# EAGLE board EEG (EAGLE 9.6.2)
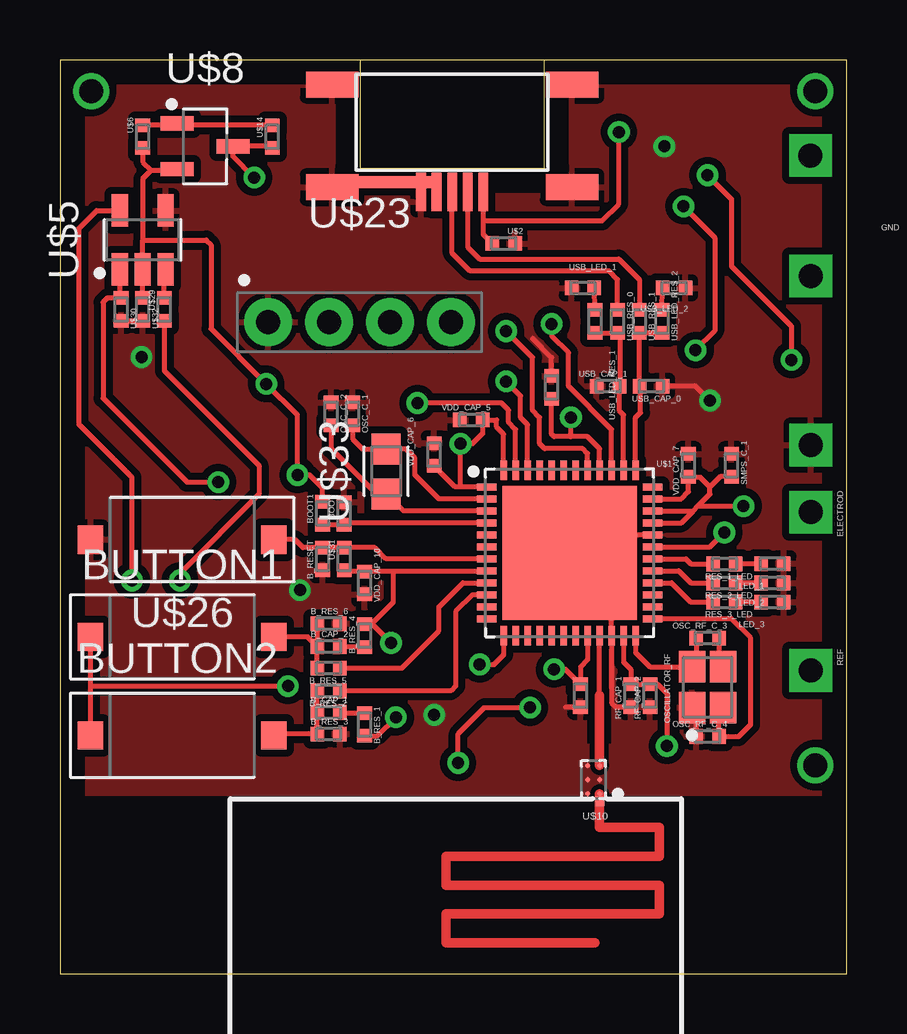
[diagram p0: board, top side]
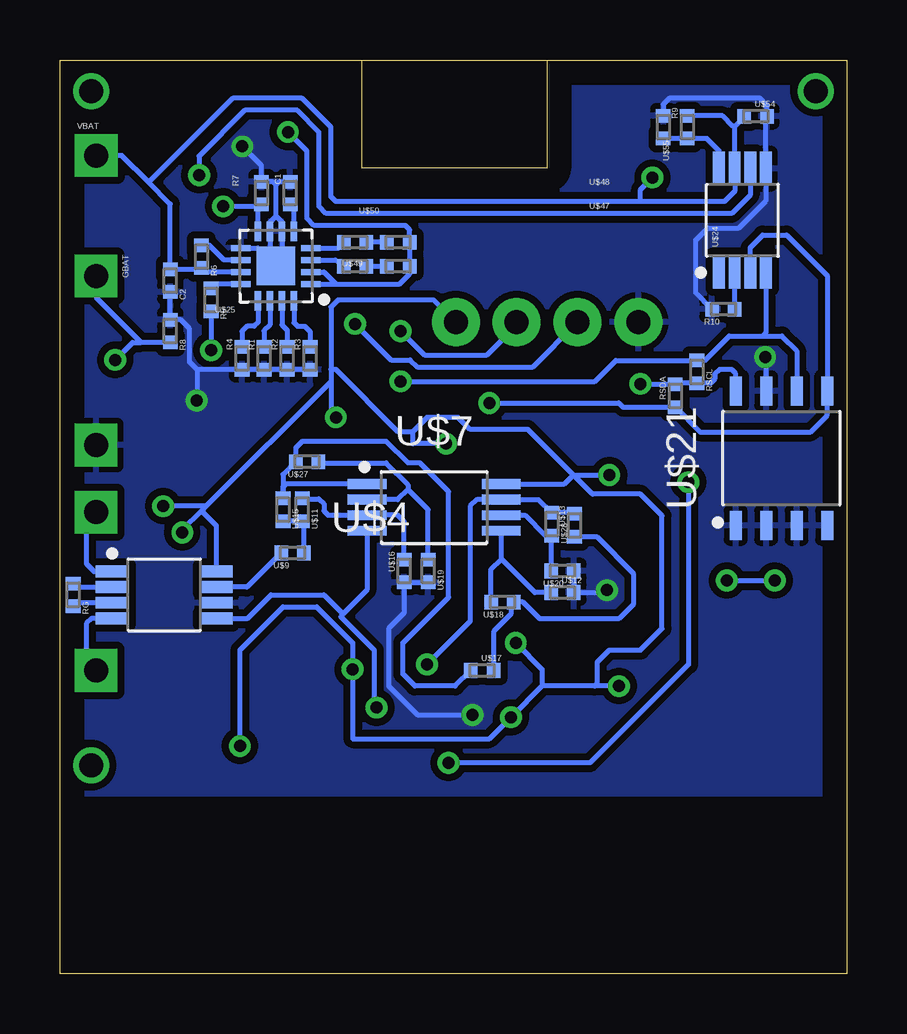
[diagram p1: board, bottom side, seen from below]

Size 32.8 x 38.1 mm. Coordinates in mm from the lower left corner, seen from the top.
Outline: 0,0 32.8,0 32.8,38.1 0,38.1 0,0
Copper layers (1*16): Top 0.035mm / dielectric 1.5mm / Bottom 0.035mm
Design rules "default": minimum track width 6mil, minimum drill 0.35mm, track to track 6mil, track to pad 6mil, pad to pad 6mil, via to via 6mil, smd to smd 6mil, copper to edge 40mil, drill to drill 6mil, minimum pad ring 10mil, minimum via ring 8mil, stop-mask expansion 4mil, vias tented up to drill 0mil, thermal gap 10mil

## Footprints (pad centres in the part's own frame; a part is rotated, then mirrored left to right if it is on the bottom)
C0402 = smd 0.562 x 0.612: 1 -0.475,0; 2 0.475,0
R0402 = smd 0.562 x 0.612: 1 -0.475,0; 2 0.475,0
BUTTON = smd 1.062 x 1.172: 1 -3.825,0; 2 3.825,0
PIN-1 = drill 1 pad 1.778 square: P$1 0,0
NX2520SA = smd 1.312 x 1.112: 1 -0.85,0.65; 2 -0.85,-0.65; 3 0.85,-0.65; 4 0.85,0.65
STM32WB55 = smd 0.812 x 0.282: 1 -3.45,2.75; 2 -3.45,2.25; 3 -3.45,1.75; 4 -3.45,1.25; 5 -3.45,0.75; 6 -3.45,0.25; 7 -3.45,-0.25; 8 -3.45,-0.75; 9 -3.45,-1.25; 10 -3.45,-1.75; 11 -3.45,-2.25; 12 -3.45,-2.75; 25 3.45,-2.75; 26 3.45,-2.25; 27 3.45,-1.75; 28 3.45,-1.25; 29 3.45,-0.75; 30 3.45,-0.25; 31 3.45,0.25; 32 3.45,0.75; 33 3.45,1.25; 34 3.45,1.75; 35 3.45,2.25; 36 3.45,2.75 | smd 0.282 x 0.812: 13 -2.75,-3.45; 14 -2.25,-3.45; 15 -1.75,-3.45; 16 -1.25,-3.45; 17 -0.75,-3.45; 18 -0.25,-3.45; 19 0.25,-3.45; 20 0.75,-3.45; 21 1.25,-3.45; 22 1.75,-3.45; 23 2.25,-3.45; 24 2.75,-3.45; 37 2.75,3.45; 38 2.25,3.45; 39 1.75,3.45; 40 1.25,3.45; 41 0.75,3.45; 42 0.25,3.45; 43 -0.25,3.45; 44 -0.75,3.45; 45 -1.25,3.45; 46 -1.75,3.45; 47 -2.25,3.45; 48 -2.75,3.45 | smd 5.6 x 5.6: 49 0,0
ANT = smd 0.4 x 0.4: ANT_IN 0,0.2
AD8422 = smd 1.362 x 0.497: 1 -2.175,0.975; 2 -2.175,0.325; 3 -2.175,-0.325; 4 -2.175,-0.975; 5 2.175,-0.975; 6 2.175,-0.325; 7 2.175,0.325; 8 2.175,0.975
TPS60403 = smd 1.362 x 0.672: 1 -1.225,0.95; 2 -1.225,0; 3 -1.225,-0.95; 4 1.225,-0.95; 5 1.225,0.95
LM358 = smd 1.612 x 0.407: 1 -2.8,0.975; 2 -2.8,0.325; 3 -2.8,-0.325; 4 -2.8,-0.975; 5 2.8,-0.975; 6 2.8,-0.325; 7 2.8,0.325; 8 2.8,0.975
MCP1703 = smd 1.382 x 0.598: 1 -1.163,0.95; 2 -1.163,-0.95; 3 1.163,0
MLPF-WB55-01E3 = smd 0.2 x 0.2: A1 -0.25,0.587; A2 0.25,0.587; B1 -0.25,0; B2 0.25,0; C1 -0.25,-0.587; C2 0.25,-0.587
M24M01 = smd 1.212 x 0.502: 1 -2.8,1.905; 2 -2.8,0.635; 3 -2.8,-0.635; 4 -2.8,-1.905; 5 2.8,-1.905; 6 2.8,-0.635; 7 2.8,0.635; 8 2.8,1.905
USBT = smd 2.184 x 1.067: P$1 5,1.57; P$2 -5,1.57; P$3 -5,-2.7; P$4 5,-2.7 | smd 0.406 x 0.813: P$5 0,-2.5; P$6 -0.65,-2.5; P$7 0.65,-2.5; P$8 1.3,-2.5; P$9 -1.3,-2.5; P$10 0,-3.3; P$11 -0.65,-3.3; P$12 -1.3,-3.3; P$13 0.65,-3.3; P$14 1.3,-3.3 | smd 1.016 x 0.508: P$15 -1.35,-2.5; P$16 -2.35,-2.5; P$17 -3.35,-2.5; P$18 -4.1,-2.5
SWD = drill 1 pad 2: 1 -3.81,0; 2 -1.27,0; 3 1.27,0; 4 3.81,0
STC3100 = smd 1.412 x 0.492: 1 -2.15,0.975; 2 -2.15,0.325; 3 -2.15,-0.325; 4 -2.15,-0.975; 5 2.15,-0.975; 6 2.15,-0.325; 7 2.15,0.325; 8 2.15,0.975
L6924D = smd 0.812 x 0.256: 1 -1.45,0.75; 2 -1.45,0.25; 3 -1.45,-0.25; 4 -1.45,-0.75; 9 1.45,-0.75; 10 1.45,-0.25; 11 1.45,0.25; 12 1.45,0.75 | smd 0.256 x 0.812: 5 -0.75,-1.45; 6 -0.25,-1.45; 7 0.25,-1.45; 8 0.75,-1.45; 13 0.75,1.45; 14 0.25,1.45; 15 -0.25,1.45; 16 -0.75,1.45 | smd 1.6 x 1.6: 17 0,0
RESM2012X60N = smd 1.287 x 1.212: 1 -0.938,0; 2 0.938,0

## Placement (x,y rotation side)
B_CAP_1  0.1u  [C0402]  11.2,10.9 180 top
B_CAP_2  0.1u  [C0402]  11.2,13.65 180 top
B_RES_1  100om  [R0402]  12.7,10.4 90 top
B_RES_2  220om  [R0402]  11.2,11.8 0 top
B_RES_3  220k  [R0402]  11.2,10 180 top
B_RES_4  100om  [R0402]  12.7,14.1 270 top
B_RES_5  220om  [R0402]  11.2,12.75 0 top
B_RES_6  220k  [R0402]  11.2,14.6 180 top
B_RESET  1uf  [C0402]  10.95,17.3 270 top
BOOT  BOOT  [C0402]  11.84,19.19 270 top
BOOT1  BOOT  [C0402]  10.95,19.2 270 top
BUTTON1  BUTTON  [BUTTON]  5.1,14.05 0 top
BUTTON2  BUTTON  [BUTTON]  5.1,9.95 0 top
C1  10nf  [C0402]  23.2,32.55 270 bottom
C2  4.7uf  [C0402]  28.2,28.9 90 bottom
ELECTROD  PIN-1  [PIN-1]  31.3,19.25 270 top
GBAT  PIN-1  [PIN-1]  31.3,29.1 270 bottom
GND  PIN-1  [PIN-1]  31.3,22.05 270 top
LED_1  LED  [R0402]  29.7,17.1 0 top
LED_2  LED  [R0402]  29.7,16.3 0 top
LED_3  LED  [R0402]  29.7,15.5 0 top
OSC_C_1  0  [C0402]  12.2,23.35 90 top
OSC_C_2  0  [C0402]  11.3,23.35 90 top
OSC_RF_C_3  0  [C0402]  27,14 180 top
OSC_RF_C_4  0  [C0402]  27,9.9 180 top
OSCILLATOR_RF  32mhz  [NX2520SA]  27,11.95 90 top
R1  60k  [R0402]  24.29,25.66 270 bottom
R2  50k  [R0402]  23.33,25.66 270 bottom
R3  50k  [R0402]  22.37,25.66 270 bottom
R4  3.3k  [R0402]  25.21,25.66 270 bottom
R5  1k  [R0402]  26.5,28.1 90 bottom
R6  0  [R0402]  26.9,29.9 90 bottom
R7  470  [R0402]  24.4,32.55 90 bottom
R8  10-50mO  [R0402]  28.2,26.8 90 bottom
R9  1k  [R0402]  6.65,35.3 270 bottom
R10  200k  [R0402]  5.14,27.71 0 bottom
REF  PIN-1  [PIN-1]  31.3,12.65 270 top
RES_1_LED  680om  [R0402]  27.7,17.09 0 top
RES_2_LED  680om  [R0402]  27.7,16.3 0 top
RES_3_LED  680om  [R0402]  27.7,15.51 0 top
RF_CAP_1  100pf  [C0402]  23.8,11.6 270 top
RF_CAP_2  100pf  [C0402]  24.6,11.6 270 top
RG  1Om  [R0402]  32.25,15.8 90 bottom
RSCL  4.7K  [R0402]  6.25,25.1 90 bottom
RSDA  4.7K  [R0402]  7.15,24.1 270 bottom
SMPS_C_1  100nf  [C0402]  28,21.2 90 top
U$1  STM32WB55  [STM32WB55]  21.25,17.55 0 top
U$2  1uf  [C0402]  18.5,30.45 180 top
U$3  ANT  [ANT]  22.5,7.4 180 top
U$4  AD8422  [AD8422]  28.45,15.8 0 bottom
U$5  TPS60403  [TPS60403]  3.45,30.6 90 top
U$6  1uf  [C0402]  3.45,34.9 270 top
U$7  LM358  [LM358]  17.2,19.45 0 bottom
U$8  MCP1703  [MCP1703]  6.05,34.5 0 top
U$9  330nf  [C0402]  23.1,17.55 0 bottom
U$10  MLPF-WB55-01E3DEFAULT  [MLPF-WB55-01E3]  22.25,8.1 180 top
U$11  330nf  [C0402]  22.7,19.35 90 bottom
U$12  330nf  [C0402]  11.85,15.9 180 bottom
U$13  330nf  [C0402]  11.35,18.7 270 bottom
U$14  1uf  [C0402]  8.85,34.9 270 top
U$15  60k  [R0402]  23.5,19.35 90 bottom
U$16  60k  [R0402]  18.45,16.8 270 bottom
U$17  9.5k  [R0402]  15.2,12.65 180 bottom
U$18  9.5k  [R0402]  14.35,15.5 0 bottom
U$19  0  [R0402]  17.45,16.8 90 bottom
U$20  0  [R0402]  11.85,16.8 0 bottom
U$21  M24M01  [M24M01]  2.72,21.5 90 bottom
U$22  USBUSBT  [USBT]  16.35,35.5 0 top
U$23  SWDSWDD  [SWD]  12.49,27.17 0 top
U$24  STC3100  [STC3100]  4.35,31.42 90 bottom
U$25  L6924D  [L6924D]  23.8,29.51 180 bottom
U$26  BUTTON  [BUTTON]  5.1,18.1 180 top
U$27  0  [R0402]  22.5,21.35 0 bottom
U$28  0  [R0402]  12.3,18.75 90 bottom
U$29  1uf  [C0402]  4.35,27.7 270 top
U$30  1uf  [C0402]  2.55,27.7 90 top
U$31  RESISTORR0402  [R0402]  11.85,17.3 270 top
U$32  1uf  [C0402]  3.45,27.7 90 top
U$33  OSC_32KH  [RESM2012X60N]  13.6,20.95 90 top
U$47  1k  [R0402]  18.7,29.5 180 bottom
U$48  1k  [R0402]  18.7,30.5 180 bottom
U$49  LED  [R0402]  20.5,29.5 180 bottom
U$50  LED  [R0402]  20.5,30.5 180 bottom
U$54  1uf  [C0402]  3.8,35.75 180 bottom
U$55  220nf  [C0402]  7.65,35.3 90 bottom
USB_CAP_0  47p  [C0402]  24.65,24.5 0 top
USB_CAP_1  47p  [C0402]  22.85,24.5 180 top
USB_LED_1  LED  [R0402]  21.8,28.6 180 top
USB_LED_2  LED  [R0402]  25.6,28.6 0 top
USB_LED_RES_1  5k  [R0402]  22.3,27.2 90 top
USB_LED_RES_2  5k  [R0402]  25.1,27.2 90 top
USB_RES_0  22om  [R0402]  23.25,27.2 90 top
USB_RES_1  22om  [R0402]  24.15,27.2 90 top
VBAT  PIN-1  [PIN-1]  31.29,34.12 0 bottom
VDD_CAP_1  100nf  [C0402]  21.7,11.6 90 top
VDD_CAP_5  100nf  [C0402]  17.15,23.1 180 top
VDD_CAP_6  4.7 uf  [C0402]  15.6,21.65 270 top
VDD_CAP_7  100nf  [C0402]  26.2,21.2 270 top
VDD_CAP_10  1 uf  [C0402]  12.7,16.3 90 top
VDDUSB_CAP_2  0  [C0402]  20.5,24.45 90 top

## Library data of the parts
B_CAP_1 B_CAP_2 B_RES_1-B_RES_6 B_RESET BOOT BOOT1 BUTTON1 BUTTON2 C1 C2 ELECTROD GBAT GND LED_1-LED_3 OSC_C_1 OSC_C_2 OSC_RF_C_3 OSC_RF_C_4 OSCILLATOR_RF R1-R10 REF RES_1_LED RES_2_LED RES_3_LED RF_CAP_1 RF_CAP_2 RG RSCL RSDA SMPS_C_1 U$1-U$33 U$47-U$50 U$54 U$55 USB_CAP_0 USB_CAP_1 USB_LED_1 USB_LED_2 USB_LED_RES_1 USB_LED_RES_2 USB_RES_0 USB_RES_1 VBAT VDD_CAP_1 VDD_CAP_5-VDD_CAP_7 VDD_CAP_10 VDDUSB_CAP_2 = EEG

## Nets
GND: B_RES_3.1 B_RES_6.1 B_RESET.2 BOOT.1 C1.1 C2.1 GND.P$1 LED_1.2 LED_2.2 LED_3.2 OSC_C_1.2 OSC_C_2.2 OSC_RF_C_4.2 OSCILLATOR_RF.1 R1.2 R2.2 R3.2 R4.2 R7.2 R8.2 R10.1 RF_CAP_1.2 RF_CAP_2.2 SMPS_C_1.2 U$1.22 U$1.32 U$1.49 U$2.1 U$4.6 U$5.4 U$10.A2 U$10.B1 U$10.B2 U$10.C2 U$12.1 U$16.2 U$19.1 U$20.2 U$21.1 U$21.2 U$21.3 U$21.4 U$21.7 U$22.P$1 U$22.P$2 U$22.P$3 U$22.P$4 U$22.P$12 U$23.1 U$24.5 U$25.6 U$25.7 U$25.9 U$25.17 U$26.2 U$30.1 U$32.1 U$54.1 U$55.2 USB_CAP_0.2 USB_CAP_1.2 USB_LED_1.2 USB_LED_2.2 VDD_CAP_1.1 VDD_CAP_5.2 VDD_CAP_6.1 VDD_CAP_7.1 VDD_CAP_10.1 VDDUSB_CAP_2.2
N$1: U$1.21 U$10.C1
N$2: BOOT1.2 BOOT.2 U$1.4
N$3: U$1.39 U$23.2
N$4: OSC_RF_C_4.1 OSCILLATOR_RF.2 U$1.25
N$5: U$1.41 U$23.3
N$6: RES_1_LED.1 U$1.30
N$7: U$3.ANT_IN U$10.A1
N$8: RES_2_LED.1 U$1.29
N$9: RES_3_LED.1 U$1.28
N$10: LED_1.1 RES_1_LED.2
N$11: LED_2.1 RES_2_LED.2
N$12: LED_3.1 RES_3_LED.2
N$13: U$1.37 USB_CAP_0.1 USB_LED_RES_2.1 USB_RES_1.1
N$14: U$1.38 USB_CAP_1.1 USB_LED_RES_1.1 USB_RES_0.1
N$15: R10.2 U$24.2
N$16: B_RES_5.2 U$1.9
N$18: B_CAP_2.2 B_RES_5.1 B_RES_6.2 BUTTON1.2
N$19: U$22.P$10 USB_RES_0.2
N$20: U$22.P$13 USB_RES_1.2
N$21: U$2.2 U$22.P$14 U$25.1 U$25.2 U$47.1 U$48.1
N$22: R2.1 U$25.15
N$23: RSDA.2 U$1.47 U$21.5 U$24.3
N$24: B_CAP_2.1 B_RES_4.2
N$25: B_RES_2.2 U$1.10
N$26: OSC_C_2.1 U$1.3 U$33.1
N$27: B_RESET.1 U$1.7 U$26.1 U$31.1
N$28: OSC_C_1.1 U$1.2 U$33.2
N$29: USB_LED_2.1 USB_LED_RES_2.2
N$30: OSC_RF_C_3.1 OSCILLATOR_RF.3
N$31: C1.2 U$25.5
N$32: U$48.2 U$50.1
N$33: U$47.2 U$49.1
N$34: R3.1 U$25.16
N$35: U$25.3 U$49.2
N$36: U$25.4 U$50.2
N$38: R4.1 U$25.13
N$39: R1.1 U$25.14
N$42: R9.2 U$24.8 U$55.1
N$44: R5.1 R7.1 U$25.8
N$45: R5.2 U$25.12
N$46: RSCL.2 U$1.46 U$21.6 U$24.4
N$47: R6.2 U$25.10
N$48: GBAT.P$1 R8.1 U$24.6
N$49: USB_LED_1.1 USB_LED_RES_1.2
N$52: RG.2 U$4.2
N$53: RG.1 U$4.3
N$54: REF.P$1 U$4.4
N$55: ELECTROD.P$1 U$4.1
N$56: U$4.7 U$9.1
N$57: U$7.1 U$15.2 U$17.2 U$27.1
N$58: U$7.3 U$11.2 U$16.1
N$59: U$9.2 U$11.1 U$15.1
N$60: U$7.2 U$19.2 U$27.2
N$61: U$7.5 U$12.2 U$18.1
N$62: U$13.2 U$17.1 U$18.2
N$63: U$1.13 U$7.7 U$13.1 U$28.2
N$64: U$7.6 U$20.1 U$28.1
N$65: B_CAP_1.2 B_RES_2.1 B_RES_3.2 BUTTON2.2
N$66: U$6.1 U$8.1 U$14.1
N$67: U$5.3 U$29.1
N$68: U$5.5 U$29.2
N$69: B_CAP_1.1 B_RES_1.2
N$74: OSC_RF_C_3.2 OSCILLATOR_RF.4 U$1.24
V+: B_RES_1.1 B_RES_4.1 BOOT1.1 BUTTON1.1 BUTTON2.1 RF_CAP_1.1 RF_CAP_2.1 RSCL.1 RSDA.1 SMPS_C_1.1 U$1.1 U$1.8 U$1.20 U$1.23 U$1.31 U$1.33 U$1.34 U$1.35 U$1.40 U$1.48 U$4.8 U$5.2 U$6.2 U$7.8 U$8.2 U$21.8 U$23.4 U$31.2 U$32.2 VDD_CAP_1.2 VDD_CAP_5.1 VDD_CAP_6.2 VDD_CAP_7.2 VDD_CAP_10.2 VDDUSB_CAP_2.1
V-: U$4.5 U$5.1 U$7.4 U$30.2
VDD: C2.2 R6.1 R9.1 U$8.3 U$14.2 U$24.7 U$25.11 U$54.2 VBAT.P$1

## Tracks (layer width: path | path; a pad name or v marks a point on that pad's centre or on a via)
GND  (via drill 0.5 pad 0.75)
  Top 0.2: U$1.32 22.1,18.3 21.35,17.55 U$1.49 23,15.8 U$1.22 23,11.3 23.18,11.12 RF_CAP_1.2 | OSC_RF_C_4.2 26.52,10.92 OSCILLATOR_RF.1 | U$32.1 U$30.1 | 21.07,11.12 VDD_CAP_1.1 | v27.1,23.9 26.5,24.5 USB_CAP_0.2 | VDDUSB_CAP_2.2 20.5,25.7 19.7,26.5
  Bottom 0.2: U$25.17 24.05,29.76 U$25.7 24.05,31.35 23.8,31.6 | U$25.17 23.55,29.76 U$25.6 23.55,31.35 23.8,31.6 | 23.8,31.6 23.8,32.9 | 23.8,32.9 23.68,33.03 C1.1 | 23.8,32.9 23.93,33.03 R7.2 24.4,33.7 v25.2,34.5 | U$25.9 24.55,30.26 U$25.17 | 28.18,28.4 C2.1 R8.2 27.77,27.28 27.4,26.9 27.4,25.5 27.09,25.19 | R3.2 R2.2 R1.2 R4.2 27.09,25.19 | R10.1 6.3,28.39 6.3,30.6 5.8,31.1 4.5,31.1 3.38,32.22 U$24.5 3.38,35.7 U$54.1 3.32,36.22 3.6,36.5 7.4,36.5 7.65,36.25 U$55.2 | U$21.7 3.35,25.67 v3.4,25.72 | U$19.1 U$16.2 18.45,15.05 19.1,14.4 19.1,12 17.9,10.8 v15.6,10.8 | U$20.2 U$12.1 10.1,15.9 v10,16 | 27.09,25.19 27.09,23.92 v27.1,23.9
  pour Top (isolate 0.3): 32.7,7.5 0.1,7.5 0.1,38 12.3,38 12.3,33.1 20.4,33.1 20.4,38 32.7,38
  pour Top (isolate 0.2): 20.9,7.6 20.9,9.4 20.8,9.5 23.6,9.5 23.8,9.3 23.8,7.6
  pour Bottom (isolate 0.3): 0.1,7.5 0.1,38 12.4,38 12.4,33.5 20.3,33.5 20.3,38 32.7,38 32.7,7.5
N$1
  Top 0.2: 22.5,11.6 U$1.21
  Top 0.4: U$10.C1 22.5,11.6
N$2
  Top 0.2: U$1.4 11.92,18.8 BOOT.2 10.96,18.72 BOOT1.2
N$3  (via drill 0.5 pad 0.75)
  Top 0.2: U$1.39 23,22.7 21.2,24.5 21.2,25.9 20.5,26.6 v20.5,27.1
  Bottom 0.2: v20.5,27.1 19,25.6 18.2,25.6 17.9,25.3 13.09,25.3 U$23.2
N$4
  Top 0.2: OSCILLATOR_RF.2 27.48,10.92 OSC_RF_C_4.1 28.3,9.9 28.8,10.4 28.8,14 28,14.8 U$1.25
N$5  (via drill 0.5 pad 0.75)
  Top 0.2: U$1.41 22,21.7 21.8,21.9 20.2,21.9 20,22.1 20,23.2 19.7,23.5 19.7,25.7 v18.6,26.8
  Bottom 0.2: v18.6,26.8 17.6,25.8 15,25.8 13.76,27.04 U$23.3
N$6
  Top 0.2: U$1.30 26.1,17.3 26.31,17.09 RES_1_LED.1
N$7
  Top 0.4: U$10.A1 U$3.ANT_IN
N$8
  Top 0.2: U$1.29 25.8,16.8 26.3,16.3 RES_2_LED.1
N$9
  Top 0.2: U$1.28 25.5,16.3 26.29,15.51 RES_3_LED.1
N$10
  Top 0.2: LED_1.1 29.21,17.09 RES_1_LED.2
N$11
  Top 0.2: LED_2.1 RES_2_LED.2
N$12
  Top 0.2: LED_3.1 28.18,15.5 RES_3_LED.2
N$13
  Top 0.2: 24,24.33 USB_CAP_0.1 | USB_CAP_0.1 24.15,24.53 USB_RES_1.1 USB_LED_RES_2.1 | U$1.37 24,23.2 24.2,23.4 24.2,24.47 USB_CAP_0.1
N$14
  Top 0.2: 23.5,24.33 USB_CAP_1.1 | USB_CAP_1.1 23.35,24.53 23.35,26.62 USB_RES_0.1 USB_LED_RES_1.1 | USB_CAP_1.1 23.32,23.47 23.5,23.3 U$1.38
N$15
  Bottom 0.2: R10.2 4.66,29.26 U$24.2
N$16
  Top 0.2: B_RES_5.2 14.25,12.75 15.8,14.3 15.8,15.3 16.8,16.3 U$1.9
N$18
  Top 0.2: B_RES_5.1 B_CAP_2.2 | B_RES_6.2 B_CAP_2.2 | B_CAP_2.2 10.32,14.05 BUTTON1.2
N$19
  Top 0.2: USB_RES_0.2 23.25,28.95 22.9,29.3 17.1,29.3 16.35,30.05 U$22.P$10
N$20
  Top 0.2: U$22.P$13 17,30.3 17.5,29.8 23.3,29.8 24.15,28.95 USB_RES_1.2
N$21  (via drill 0.5 pad 0.75)
  Top 0.2: U$2.2 17.65,30.83 17.65,31.4 | 17.65,31.4 U$22.P$14 | v23.3,35.1 23.3,32.1 22.6,31.4 17.65,31.4
  Bottom 0.2: U$25.1 21.3,28.76 | 21.3,28.76 18.64,28.76 18.23,29.17 U$47.1 U$48.1 18.23,31.03 18.4,31.2 22.2,31.2 22.5,31.5 22.5,34.3 v23.3,35.1 | U$25.2 21.8,29.26 21.3,28.76
N$22
  Bottom 0.2: U$25.15 23.55,27.05 23.33,26.83 R2.1
N$23  (via drill 0.5 pad 0.75)
  Top 0.2: U$1.47 19,22.7 18.7,23 18.7,23.5 18.4,23.8 v14.9,23.8
  Bottom 0.2: v14.9,23.8 9.5,23.8 9.32,23.62 RSDA.2 6.12,22.6 1.5,22.6 0.81,23.28 U$21.5 0.81,29.11 2.5,30.8 3.5,30.8 4.02,30.28 U$24.3
N$24
  Top 0.2: B_CAP_2.1 12.67,13.65 B_RES_4.2
N$25
  Top 0.2: U$1.10 17.2,15.8 16.5,15.1 16.5,12 16.3,11.8 B_RES_2.2
N$26
  Top 0.2: U$1.3 14.31,19.3 U$33.1 13.19,20.01 11.3,21.9 OSC_C_2.1
N$27
  Top 0.2: U$26.1 9.8,18.1 10.12,17.77 B_RESET.1 U$31.1 13.12,17.77 13.6,17.3 U$1.7
N$28
  Top 0.2: U$1.2 15.8,19.8 14.8,20.8 14.8,21.5 14.41,21.89 U$33.2 12.61,21.89 12.2,22.3 OSC_C_1.1
N$29
  Top 0.2: USB_LED_RES_2.2 USB_LED_2.1
N$30
  Top 0.2: OSC_RF_C_3.1 27.48,12.98 OSCILLATOR_RF.3
N$31
  Bottom 0.2: U$25.5 23.05,31.92 C1.2
N$32
  Bottom 0.2: U$48.2 U$50.1
N$33
  Bottom 0.2: U$49.1 U$47.2
N$34
  Bottom 0.2: U$25.16 23.05,27.15 22.9,27 22.6,27 22.37,26.77 R3.1
N$35
  Bottom 0.2: U$25.3 21.32,29.76 U$49.2
N$36
  Bottom 0.2: U$25.4 21.16,30.26 U$50.2
N$37  (via drill 1 pad 1.3)
  other vias: 31.5,8.7
N$38
  Bottom 0.2: U$25.13 24.55,27.15 24.7,27 25,27 25.21,26.79 R4.1
N$39
  Bottom 0.2: U$25.14 24.05,27.05 24.29,26.81 R1.1
N$40  (via drill 1 pad 1.3)
  other vias: 31.5,36.8
N$41  (via drill 1 pad 1.3)
  other vias: 1.3,36.8
N$42
  Bottom 0.2: 5.38,33.62 U$24.8 5.32,34.33 5.82,34.83 R9.2 U$55.1
N$44  (via drill 0.5 pad 0.75)
  Top 0.2: v26,32 27.3,30.7 27.3,26.8 v26.5,26
  Bottom 0.2: U$25.8 24.55,31.92 R7.1 24.48,32 v26,32 | R5.1 v26.5,26
N$45
  Bottom 0.2: U$25.12 26.24,28.76 26.43,28.58 R5.2
N$46  (via drill 0.5 pad 0.75)
  Top 0.2: U$1.46 19.5,22.9 19.2,23.2 19.2,24.1 v18.6,24.7
  Bottom 0.2: 3.5,26.6 4.9,26.6 5.92,25.58 RSCL.2 9.62,25.58 10.5,24.7 v18.6,24.7 | 3.5,26.6 2.7,26.6 2.09,25.98 U$21.6 | U$24.4 3.38,26.72 3.5,26.6
N$47
  Bottom 0.2: U$25.10 25.96,29.76 26.57,30.38 R6.2
N$48  (via drill 0.5 pad 0.75)
  Top 0.2: v27,33.3 28,32.3 28,29.5 30.5,27 v30.5,25.6
  Bottom 0.2: GBAT.P$1 31.27,29.12 31.27,28.17 29.43,26.33 | U$24.6 4.02,32.47 4.8,31.7 21.7,31.7 22,32 22,35.1 22.9,36 25.1,36 27,34.1 v27,33.3 | R8.1 29.43,26.33 | v30.5,25.6 29.77,26.33 29.43,26.33
N$49
  Top 0.2: USB_LED_RES_1.2 USB_LED_1.1
N$52
  Bottom 0.2: RG.2 32.1,16.12 U$4.2
N$53
  Bottom 0.2: RG.1 32.1,15.48 U$4.3
N$54
  Bottom 0.2: U$4.4 31.48,14.83 31.7,14.6 31.7,13.05 REF.P$1
N$55
  Bottom 0.2: ELECTROD.P$1 31.7,18.85 31.7,17.1 31.37,16.77 U$4.1
N$56
  Bottom 0.2: U$9.1 25,16.12 U$4.7
N$57
  Bottom 0.2: U$17.2 16.32,12 18,12 18.5,12.5 18.5,13.8 16.6,15.7 16.6,20.1 17.8,21.3 18.3,21.3 19.2,22.2 22.7,22.2 22.98,21.92 U$27.1 23.5,20.83 U$15.2 23.5,20.3 23.37,20.42 U$7.1
N$58
  Bottom 0.2: 18.62,17.45 U$16.1 18.45,18.85 18.73,19.12 U$7.3 21.62,19.12 21.8,19.3 21.8,19.6 22,19.8 22.68,19.8 U$11.2
N$59
  Bottom 0.2: U$9.2 22.62,18.8 U$11.1 U$15.1
N$60
  Bottom 0.2: U$27.2 21.98,21.3 19.2,21.3 18.3,20.4 18.3,20.2 | 18.3,20.2 18.73,19.77 U$7.2 | U$19.2 17.45,19.35 18.3,20.2
N$61
  Bottom 0.2: U$12.2 13,15.9 14.4,17.3 | 14.4,17.3 U$7.5 | U$18.1 14.82,16.88 14.4,17.3
N$62
  Bottom 0.2: U$13.2 10.42,18.23 8.9,16.7 8.9,15.4 9.5,14.8 12.8,14.8 13.5,15.5 U$18.2 14,15.38 14,15 14.73,14.27 U$17.1
N$63  (via drill 0.5 pad 0.75)
  Top 0.2: U$1.13 18.5,13.3 18.1,12.9 v17.5,12.9
  Bottom 0.2: U$13.1 11.4,19.23 U$28.2 12.85,19.77 U$7.7 15.42,19.77 15.7,19.5 15.7,14.7 v17.5,12.9
N$64
  Bottom 0.2: U$7.6 13.42,19.12 12.57,18.27 U$28.1 12.32,18.25 U$20.1
N$65
  Top 0.2: BUTTON2.2 8.98,10 B_RES_3.2 B_CAP_1.2 B_RES_2.1
N$66
  Top 0.2: U$14.1 4.96,35.38 U$8.1 4.81,35.38 U$6.1
N$67
  Top 0.2: U$29.1 4.35,29.33 U$5.3
N$68  (via drill 0.5 pad 0.75)
  Top 0.2: U$29.2 4.35,25.15 8.3,21.2 8.3,20 5,16.7 v5,16.4 | v3,16.4 3,20.7 0.8,22.9 0.8,31.1 1.52,31.83 U$5.5
  Bottom 0.2: v5,16.4 v3,16.4
N$69
  Top 0.2: B_CAP_1.1 11.7,10.88 B_RES_1.2
N$74
  Top 0.2: U$1.24 24,13.4 24.6,12.8 OSCILLATOR_RF.4 26.52,12.98 OSC_RF_C_3.2
V+  (via drill 0.5 pad 0.75)
  Top 0.2: 23.8,12.02 RF_CAP_1.1 | U$1.23 23.5,13 23.8,12.7 RF_CAP_1.1 | RF_CAP_1.1 RF_CAP_2.1 24.93,12.08 25.3,11.7 v25.3,9.5 | U$1.20 22,13.1 21.7,12.8 VDD_CAP_1.2 21.07,12.7 v20.6,12.7 | U$1.31 27.1,17.8 v27.7,18.4 | U$1.33 25.9,18.8 26.4,19.3 | U$1.34 26.4,19.3 | U$1.35 25.9,19.8 26.2,20.1 26.2,20.7 | 26.2,20.7 VDD_CAP_7.2 | 26.4,19.3 26.6,19.5 | 26.6,19.5 27.1,20 27.1,20.3 | 27.1,20.3 26.7,20.7 26.2,20.7 | SMPS_C_1.1 27.52,20.73 27.1,20.3 | 26.6,19.5 v28.5,19.5 | U$1.40 22.5,21.9 22,22.4 21.3,22.4 | 21.3,22.4 20.6,22.4 20.5,22.5 VDDUSB_CAP_2.1 | U$1.48 18.5,22.5 18.2,22.8 18.2,23.1 VDD_CAP_5.1 17.62,22.53 17.2,22.1 v16.7,22.1 16.7,20.3 | 21.3,22.4 v21.3,23.2 | U$1.1 16.7,20.3 | 16.7,20.3 16.48,20.3 VDD_CAP_6.2 | B_RES_1.1 13.23,9.92 v14,10.7 | v13.8,13.8 13.02,14.58 B_RES_4.1 12.98,14.58 13.9,15.5 13.9,16.77 | BUTTON2.1 1.27,12 | 1.27,12 BUTTON1.1 | U$1.8 17.77,16.77 13.9,16.77 | 13.9,16.77 VDD_CAP_10.2 11.9,16.77 U$31.2 | BOOT1.1 10.95,20.25 10.4,20.8 v9.9,20.8 9.9,23.3 v8.6,24.6 6.3,26.9 6.3,30.4 6.1,30.6 3.45,30.6 | U$6.2 3.45,33.85 3.8,33.5 | 3.8,33.5 4.84,33.5 U$8.2 | 3.45,30.6 U$5.2 U$32.2 3.45,30.6 | 3.45,30.6 3.45,33.15 3.8,33.5 | 1.27,12 v9.5,12
  Bottom 0.2: U$23.4 17.23,28.1 21.2,28.1 21.5,27.8 21.5,25.2 | v21.3,23.2 21.5,23.4 21.5,24.7 | 21.5,25.2 21.5,24.7 | 21.5,24.7 26.7,19.5 | 26.7,19.5 v28.5,19.5 | 26.7,19.5 26.9,19.3 | 26.9,19.3 27.7,18.5 v27.7,18.4 | v16.7,22.1 18.1,22.1 18.1,22.6 | 11.4,20.8 v9.9,20.8 | 13.5,13.5 v13.8,13.8 12.7,12.7 12.7,12 | 10.5,12 12.7,12 | 12.7,12 v14,10.7 14.9,9.8 20.6,9.8 v20.6,12.7 20.6,13.8 22.1,15.3 23.5,15.3 25.3,13.5 v25.3,9.5 | U$21.8 4.62,25.03 4.8,25.2 5.3,25.2 5.5,25 5.5,24.8 5.67,24.62 RSCL.1 7.1,24.62 RSDA.1 8.57,24.58 v8.6,24.6 | v9.5,12 10.5,12 | U$4.8 26.27,18.67 26.9,19.3 | 11.4,20.8 13.3,22.7 15.7,22.7 16.2,23.2 17.5,23.2 18.1,22.6 | 18.1,22.6 18.7,22.6 21.3,25.2 21.5,25.2 | 13.82,20.42 U$7.8 11.77,20.42 11.4,20.8 | 10.5,12 10.4,12.1 10.4,13 9.9,13.5 8.6,13.5 7.7,14.4 7.7,19.1 8.6,20 10.6,20 11.4,20.8
V-  (via drill 0.5 pad 0.75)
  Top 0.2: U$5.1 2.5,28.22 U$30.2 1.98,28.17 1.8,28 1.8,24 5.3,20.5 v6.6,20.5 | v16.6,8.8 16.6,10 17.7,11.1 v19.6,11.1
  Bottom 0.2: v6.6,20.5 6.6,12.9 10.7,8.8 v16.6,8.8 | U$4.5 24.98,14.83 24,15.8 21.8,15.8 21,15 | v19.6,11.1 19.7,11.2 19.7,13.5 21.1,14.9 21,15 | U$7.4 20,16 21,15
VDD  (via drill 0.5 pad 0.75)
  Top 0.2: v8.1,33.2 7.21,34.09 U$8.3 8.77,34.5 U$14.2
  Bottom 0.2: U$25.11 26.79,29.26 R6.1 26.95,29.38 C2.2 28.2,32.1 29.1,33 | 31.24,34.08 VBAT.P$1 30.22,34.12 29.1,33 | 4.67,35.35 U$24.7 4.67,32.62 5.1,32.2 8.6,32.2 | U$54.2 4.67,35.35 | 4.67,35.35 4.75,35.35 5.17,35.78 R9.1 | 29.1,33 25.6,36.5 22.7,36.5 21.5,35.3 21.5,32.4 21.3,32.2 8.6,32.2 | 8.6,32.2 8.6,32.7 v8.1,33.2